# Altium PCB PCB_模电_2025-09-03.pcbdoc
Units mil, origin at the board's own origin, x right, y up, seen from the top; angles counter-clockwise.
Board outline 6910 x 4415 mil, 2 copper layers (Top Layer, Bottom Layer); 50 components, 24 nets, 114 pads, 2 vias.
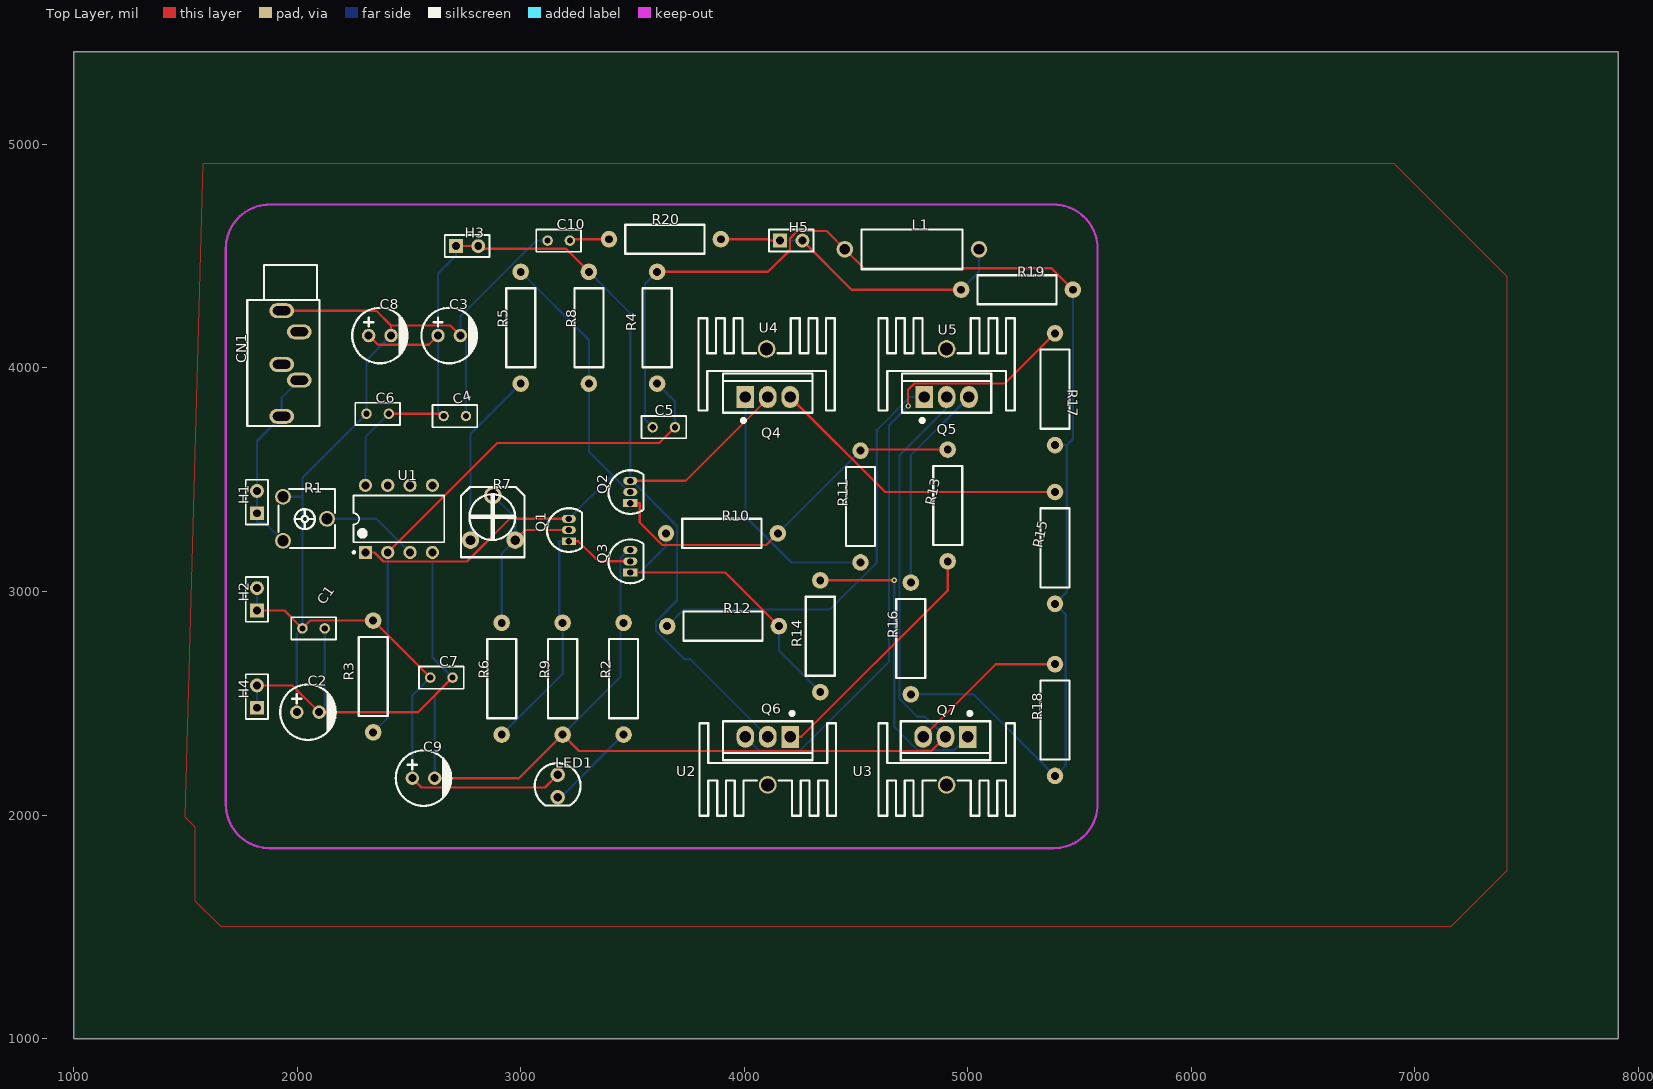
[diagram p0: Top Layer view]
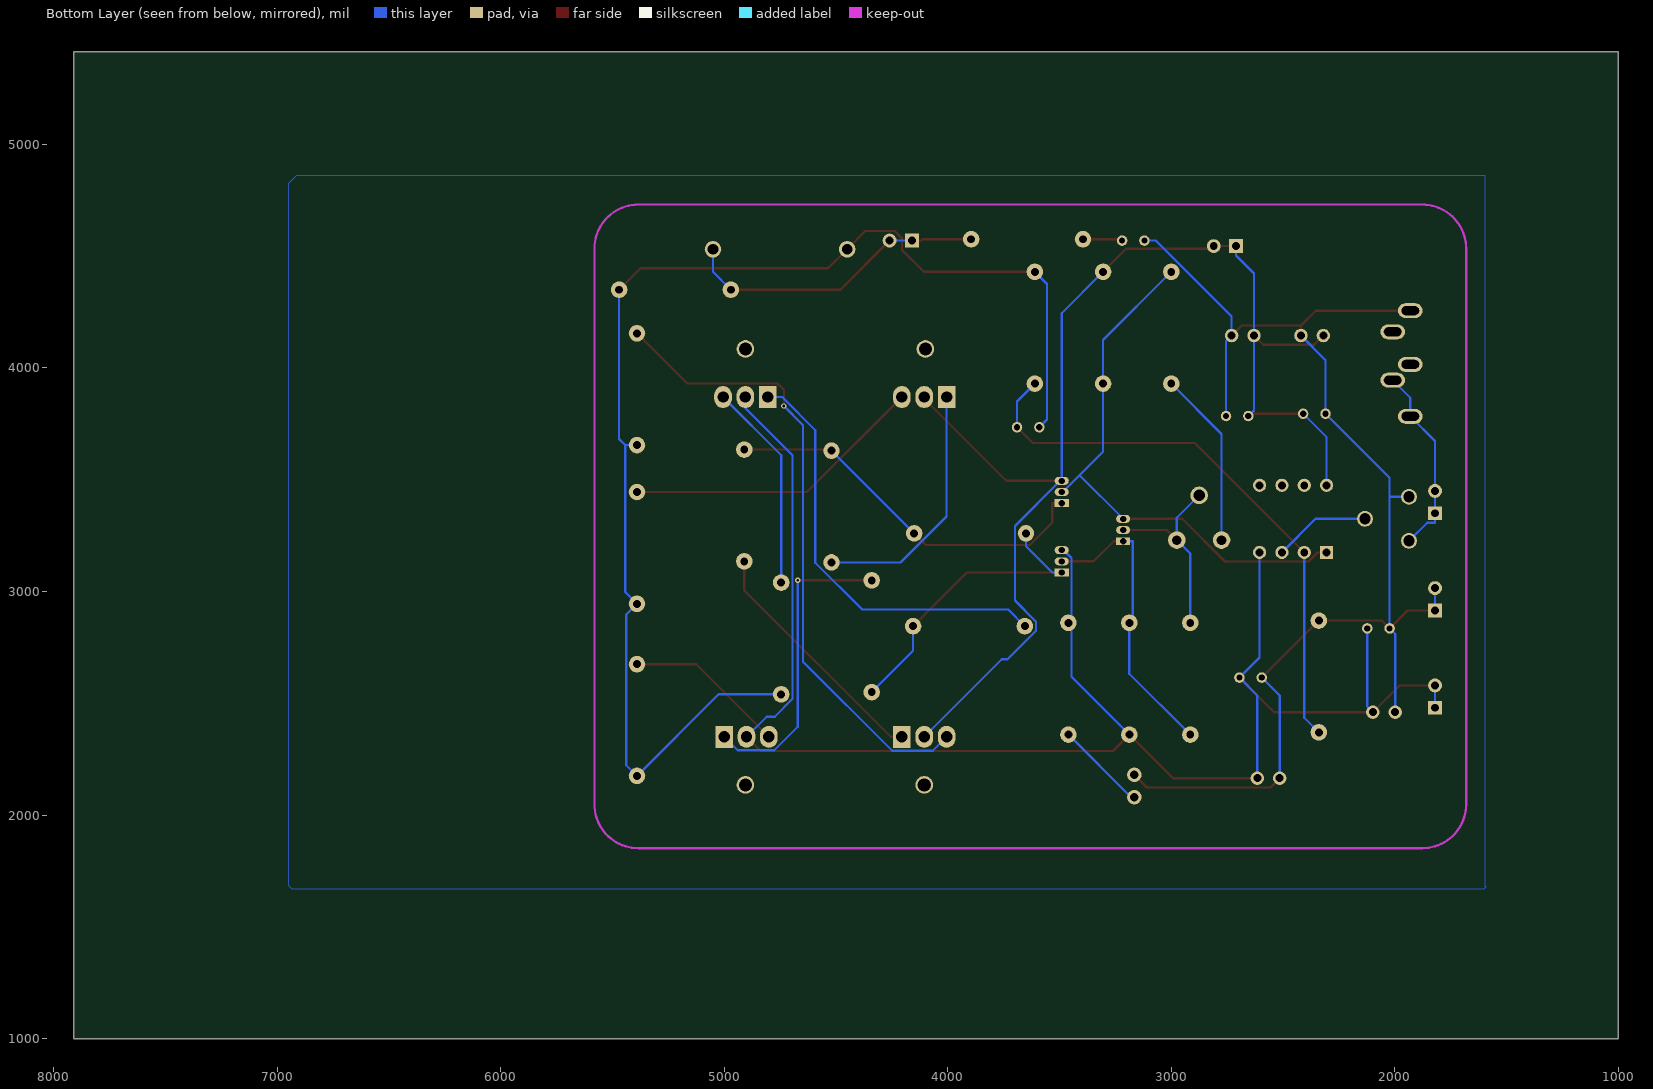
[diagram p1: Bottom Layer view, seen from below]

## Layer stack, top to bottom
Top Layer: signal copper (thickness not stored)
Dielectric: dielectric 12.6, FR-4, Dk 4.8
Bottom Layer: signal copper (thickness not stored)

## Board outline
7910,1000 1000,1000 1000,5415 7910,5415

## Components (designator, comment, footprint, x,y, rotation, side; value= is the part's Value field where it differs from the comment)
C1 "0.1u" RAD-0.1 2073.24,2835 r0 top
C2 "10u" CAP-D6.3×F2.5 2048.14,2460 r0 top
C3 "10u" CAP-D6.3×F2.5 2680,4145 r0 top
C4 "0.1u" RAD-0.1 2705.1,3785 r0 top
C5 "0.1u" RAD-0.1 3640,3735 r180 top
C6 "0.1u" RAD-0.1 2360,3795 r0 top
C7 "0.1u" RAD-0.1 2645,2615 r0 top
C8 "10u" CAP-D6.3×F2.5 2370,4145 r0 top
C9 "10u" CAP-D6.3×F2.5 2565,2165 r0 top
C10 "0.1u" RAD-0.1 3170,4570 r0 top
CN1 "PJ-325C5-G" AUDIO-TH_PJ-325C5-G 1970,4020 r270 top
H1 "HDR-2.54" HDR-F-2.54_1X2 1820,3400 r90 top
H2 "HDR-2.54" HDR-F-2.54_1X2 1820,2965 r90 top
H3 "HDR-2.54" HDR-F-2.54_1X2 2760,4545 r0 top
H4 "HDR-2.54" HDR-F-2.54_1X2 1820,2530 r90 top
H5 "HDR-2.54" HDR-F-2.54_1X2 4210,4569.9 r0 top
L1 "1U" L_AXIAL-0.6 4750,4530.9 r0 top
LED1 "LED-TH-5mm_G" LED-TH_BD5.0_GREEN 3165,2130 r0 top
Q1 "S8050" TO-92-3_L4.9-W3.7-P1.27-L 3215,3275 r90 top
Q2 "S8050" TO-92-3_L4.9-W3.7-P1.27-L 3489.99,3445 r90 top
Q3 "S8550" TO-92-3_L4.9-W3.7-P1.27-L 3490,3135 r90 top
Q4 "TIP41C" TO-220-3_L10.0-W4.5-P2.54-T 4105,3870 r90 top
Q5 "TIP42C" TO-220-3_L10.0-W4.5-P2.54-T 4905,3870 r90 top
Q6 "TIP41C" TO-220-3_L10.0-W4.5-P2.54-T 4105,2350 r270 top
Q7 "TIP42C" TO-220-3_L10.0-W4.5-P2.54-T 4900,2350 r270 top
R1 "20K" RES-ADJ-TH_EVND8AA 2035,3325 r0 top
R2 "500k" R_AXIAL-0.5 3460,2610 r90 top
R3 "1k" R_AXIAL-0.5 2340,2620 r270 top
R4 "9.1k" R_AXIAL-0.5 3610,4180 r90 top
R5 "8.2k" R_AXIAL-0.5 3000,4180 r90 top
R6 "3.3k" R_AXIAL-0.5 2915,2610 r90 top
R7 "2K" RES-ADJ-TH_VZ067TL1B202 2875,3330 r0 top
R8 "6.8k" R_AXIAL-0.5 3305,4180 r90 top
R9 "6.8k" R_AXIAL-0.5 3187.5,2610 r90 top
R10 "220R" R_AXIAL-0.5 3900,3260 r0 top
R11 "47R" R_AXIAL-0.5 4520,3380 r90 top
R12 "47R" R_AXIAL-0.5 3905,2845 r0 top
R13 "47R" R_AXIAL-0.5 4910,3385 r90 top
R14 "47R" R_AXIAL-0.5 4340,2800 r270 top
R15 "0.22R" R_AXIAL-0.5 5390,3195 r90 top
R16 "0.22R" R_AXIAL-0.5 4745,2790 r90 top
R17 "0.22R" R_AXIAL-0.5 5390,3905 r270 top
R18 "0.22R" R_AXIAL-0.5 5390,2425 r90 top
R19 "10R" R_AXIAL-0.5 5220,4350 r0 top
R20 "10R" R_AXIAL-0.5 3645,4575.9 r180 top
U1 "NE5532P" DIP-8_L9.4-W6.4-P2.54-LS9.1-BL 2455,3325 r0 top
U2 "15*10.5*21" SINK-TH_L15.0-W10.5-H21.0 4105,2135 r180 top
U3 "15*10.5*21" SINK-TH_L15.0-W10.5-H21.0 4905,2135 r180 top
U4 "15*10.5*21" SINK-TH_L15.0-W10.5-H21.0 4100,4085 r0 top
U5 "15*10.5*21" SINK-TH_L15.0-W10.5-H21.0 4905,4085 r0 top

## Footprints (in the part's own frame and the unit in brackets; to place one, negate y for a bottom-side part, rotate by r counter-clockwise, add the part's x,y. Pads: shape width x height; smd on the part's side, far side on the other; paste and mask are expansions set on the pad)
AUDIO-TH_PJ-325C5-G [mm]
  oval 1.7x2.8 hole 1 slot 2 at 90 deg paste+0 mask+0.051: 1(-6,-1) 2(-3.6,1) 3(1.9,1) 4(6,-1) 5(0.1,-1)
  silkscreen extent -11.2,-4.9 7.1,3.3
CAP-D6.3×F2.5 [mil]
  round 60 hole 36 paste+0 mask+4: 1(-50,0) 2(50,0)
  silkscreen extent -124,-124 125,124
DIP-8_L9.4-W6.4-P2.54-LS9.1-BL [mm]
  rect 1.5x1.5 hole 0.9 paste+0 mask+0.102: 1(-3.81,-3.81)
  round 1.5 hole 0.9 paste+0 mask+0.102: 2(-1.27,-3.81) 3(1.27,-3.81) 4(3.81,-3.81) 5(3.81,3.81) 6(1.27,3.81) 7(-1.27,3.81) 8(-3.81,3.81)
  silkscreen extent -5.23,-3.93 5.15,2.65
HDR-F-2.54_1X2 [mil]
  rect 62x62 hole 35 paste+0 mask+2: 1(-50,0)
  round 62 hole 35 paste+0 mask+2: 2(50,0)
  silkscreen extent -100,-49 100,50
L_AXIAL-0.6 [mil]
  round 74 hole 47.2 paste+0 mask+2: 1(-300,0) 2(300,0)
  silkscreen extent -226,-89 226,89
LED-TH_BD5.0_GREEN [mil]
  round 65 hole 38 paste+0 mask+2: 1(0,50) 2(0,-50)
  silkscreen extent -102,-88 102,102
R_AXIAL-0.5 [mil]
  round 74 hole 35.4 paste+0 mask+2: 1(-250,0) 2(250,0)
  silkscreen extent -177,-65 177,65
RAD-0.1 [mil]
  round 47 hole 28 paste+0 mask+2: 1(-50,0) 2(50,0)
  silkscreen extent -100,-50 100,50
RES-ADJ-TH_EVND8AA [mm]
  round 1.8 hole 1.3 paste+0 mask+0.051: 1(-2.5,2.5) 2(2.5,0) 3(-2.5,-2.5)
  silkscreen extent -3,-3.3 3.4,3.4
RES-ADJ-TH_VZ067TL1B202 [mm]
  round 2 hole 1.1 paste+0 mask+0.051: 1(-2.54,-2.54) 3(2.54,-2.54)
  round 2 hole 1.3 paste+0 mask+0.051: 2(0,2.54)
  silkscreen extent -3.6,-4.5 3.6,3.5
SINK-TH_L15.0-W10.5-H21.0 [mm]
  round 2 hole 1.5 paste+0 mask+0.051: 1(0,0)
  silkscreen extent -7.75,-7 7.75,3.5
TO-92-3_L4.9-W3.7-P1.27-L [mm]
  rect 0.9x1.6 hole 0.7 paste+0 mask+0.051: 1(-1.27,0)
  oval 0.9x1.6 hole 0.7 paste+0 mask+0.051: 2(0,0) 3(1.27,0)
  silkscreen extent -2.48,-1.5 2.48,2.48
TO-220-3_L10.0-W4.5-P2.54-T [mm]
  rect 2.5x2 hole 1.3 paste+0 mask+0.051: 1(0,2.54)
  oval 2.5x2 hole 1.3 paste+0 mask+0.051: 2(0,0) 3(0,-2.54)
  silkscreen extent -2.86,-5.08 2.67,5.08

## Via types
v1: diameter 24, hole 12, Top Layer to Bottom Layer, tented both sides, 2 vias

## Nets (pads, with @x,y where several pads share a name; then routed paths per layer and width w, separated by ;. In a path a pad name is that pad's centre, name@x,y a point inside that pad or via, vN(x,y) a via of type N, cw(c..) or ccw(c..) an arc to the next point about the centre after c; other vN are vias at no path point)
CN1_4: CN1.3 CN1.4 H1.1 H1.2 R1.3 | length 866
  Bottom Layer w10: R1.3 1855.16,3307.99 1820,3307.99 H1.1 H1.2 1820,3673.15 CN1.4 1930.63,3866.46 CN1.3
GND: C1.1 C2.1 C3.2 C4.2 C6.1 C7.1 C8.2 C9.1 C10.1 CN1.1 H2.1 H2.2 LED1.1 R1.1 R3.1 | length 6025.4
  Top Layer w10: H2.1 1943.24,2915 C1.1 2058.24,2870 R3.1 C7.1 ; CN1.1 2353.87,4256.22 2420,4190.09 ; C8.2 2420,4190.09 ; C9.1 2556.46,2123.54 3108.54,2123.54 LED1.1 ; C3.2 2684.91,4190.09 2420,4190.09
  Bottom Layer w10: H2.1 H2.2 ; R1.1 2023.24,3423.42 ; C2.1 1998.14,2809.9 C1.1 2023.24,3423.42 ; C8.2 2310,4035 C6.1 2023.24,3508.24 2023.24,3423.42 ; C9.1 2515,2535 C7.1 ; C4.2 2755.1,4119.9 C3.2 2730,4230.5 3069.5,4570 C10.1
LED1_2: LED1.2 R2.1 | length 411
  Bottom Layer w10: LED1.2 3180,2080 R2.1
Q3_1: Q3.1 R10.1 R12.2 R14.2 | length 1402.2
  Top Layer w10: Q3.1 3915,3085 R12.2
  Bottom Layer w10: Q3.1 3532.51,3085 3650,3202.49 R10.1 ; R12.2 4155,2735 R14.2
Q4_1: Q4.1 R11.1 | length 1134.5
  Bottom Layer w10: Q4.1 4005,3335.73 4210.73,3130 R11.1
Q4_3: Q4.3 R15.2 | length 1361
  Top Layer w10: Q4.3 4630,3445 R15.2
Q5_1: Q5.1 R12.1 | length 1921.9
  Bottom Layer w10: R12.1 3729.32,2919.32 4382.49,2919.32 4592.05,3128.88 4592.05,3721.84 4740.21,3870 4754.59,3870 Q5.1
Q5_3: Q5.3 R16.2 | length 937.7
  Bottom Layer w10: R16.2 4745,3610 Q5.3
Q6_1: Q6.1 R13.1 | length 1106.6
  Top Layer w10: Q6.1 4255.41,2350 4910,3004.59 R13.1
Q6_3: Q6.3 R17.1 | length 2845.8
  Top Layer w10: v1(4732.84,3830.01) 4732.84,3902.1 4761.01,3930.27 5165.27,3930.27 R17.1
  Bottom Layer w10: Q6.3 4066.98,2288.02 4248.47,2288.02 4647.87,2687.42 4647.87,3745.04 v1(4732.84,3830.01)
Q7_1: Q7.1 R14.1 | length 1383.6
  Top Layer w10: R14.1 v1(4670.94,3050)
  Bottom Layer w10: v1(4670.94,3050) 4670.94,2395.04 4776.29,2289.69 4939.69,2289.69 Q7.1
Q7_3: Q7.3 R18.2 | length 724.6
  Top Layer w10: Q7.3 5125,2675 R18.2
R1_2: R1.2 U1.3 | length 433.7
  Bottom Layer w10: R1.2 2355.01,3324.99 U1.3
R4_2: C5.2 L1.1 R4.2 R15.1 R16.1 R17.2 R18.1 R19.2 | length 5902.8
  Top Layer w10: R4.2 4106.51,4430 4204.33,4527.82 4204.33,4579.6 4236.92,4612.19 4368.71,4612.19 L1.1 4535.11,4445.79 5374.22,4445.78 R19.2
  Bottom Layer w10: C5.2 3555.72,3769.28 3555.72,4375.72 R4.2 ; R16.1 5025,2540 R18.1 5438.08,2223.08 5438.08,2896.92 R15.1 5442.53,2997.53 5442.53,3655 ; R17.2 5442.53,3655 ; R19.2 5470,3682.47 5442.53,3655
R6_1: Q1.1 Q3.2 R6.1 R9.2 | length 1338.9
  Top Layer w10: Q1.1 3257.51,3225 3347.51,3135 Q3.2
  Bottom Layer w10: R6.1 3187.5,2632.5 R9.2 3172.49,2875.01 3172.49,3225 Q1.1
R6_2: Q1.2 R6.2 R7.2 R7.3 | length 894.9
  Top Layer w10: R7.3 3020,3275 Q1.2
  Bottom Layer w10: R7.2 2975,3330 R7.3 2915,3170 R6.2
R7_1: R5.1 R7.1 | length 793.2
  Bottom Layer w10: R7.1 2775,3705 R5.1
R10_2: Q2.1 R10.2 R11.2 R13.2 | length 1724.3
  Top Layer w10: Q2.1 3532.5,3395 3532.5,3309.2 3633.37,3208.33 4098.33,3208.33 R10.2 ; R11.2 4525,3635 R13.2
  Bottom Layer w10: R10.2 R11.2
R19_1: H5.1 H5.2 L1.2 R19.1 R20.1 | length 1382.6
  Top Layer w10: R20.1 4111.99,4575.9 4117.99,4569.9 H5.1 ; H5.2 4479.9,4350 R19.1
  Bottom Layer w10: H5.1 H5.2 ; R19.1 5050,4430 L1.2
R20_2: C10.2 R20.2 | length 177.4
  Top Layer w10: C10.2 3225.9,4575.9 R20.2
U1_1: Q1.3 Q2.2 R5.2 R8.1 U1.1 | length 2472.8
  Top Layer w10: U1.1 2345.54,3175 2386.45,3134.09 2759.6,3134.09 2950.51,3325 Q1.3
  Bottom Layer w10: R5.2 3305,4125 R8.1 3305,3625.49 3410.25,3520.25 ; Q1.3 3410.25,3520.25 ; Q2.2 3485.49,3445 3410.25,3520.25
U1_2: C5.1 R3.2 R4.1 U1.2 | length 2577
  Top Layer w10: U1.2 2894.54,3664.54 3619.54,3664.54 C5.1
  Bottom Layer w10: R3.2 2405,2435 U1.2 ; R4.1 3690,3850 C5.1
VCC: C3.1 C4.1 C6.2 C8.1 H3.1 H3.2 Q2.3 Q4.2 Q6.2 R8.2 U1.8 | length 5685.9
  Top Layer w10: C8.1 2361.08,4103.92 2588.92,4103.92 C3.1 ; C6.2 2645.1,3795 C4.1 ; H3.1 H3.2 2822.18,4532.82 3202.18,4532.82 R8.2 ; Q2.3 3737.55,3495 4105,3862.45 Q4.2
  Bottom Layer w10: U1.8 2305,3690 C6.2 ; C4.1 2630,3810.1 C3.1 2630,4422.99 2710,4502.99 H3.1 ; R8.2 3490,4245 Q2.3 3497.33,3495 3699.36,3292.97 3699.36,2959.51 3605.15,2865.3 3605.15,2825.03 3733.03,2697.15 3757.85,2697.15 Q6.2
VEE: C1.2 C2.2 C7.2 C9.2 H4.1 H4.2 Q3.3 Q5.2 Q7.2 R2.2 R9.1 U1.4 | length 7658.9
  Top Layer w10: H4.2 1978.14,2580 C2.2 2540,2460 C7.2 ; C9.2 2992.5,2165 R9.1 3260.55,2286.95 4836.95,2286.95 Q7.2
  Bottom Layer w10: H4.1 H4.2 ; C2.2 2123.24,2485.1 C1.2 ; U1.4 2605,2705 C7.2 2615,2535 C9.2 ; R9.1 3446.58,2619.08 R2.2@3446.58,2860 ; R2.2 R2.2@3446.58,2860 ; Q3.3 3482.18,3185 3446.58,3149.4 R2.2@3446.58,2860 ; Q7.2 4810.06,2439.94 4774.15,2439.94 4694.01,2520.08 4694.01,3609.33 4905,3820.32 Q5.2
pads on no net: CN1.2 CN1.5 U1.5 U1.6 U1.7 U2.1 U3.1 U4.1 U5.1

## Polygon pours and split planes (outlines as drawn)
GND on Bottom Layer (solid): 1595,4860 6915,4860 6950,4825 6950,1685 6935,1670 1600,1670 1590,1680 1595,1680
GND on Top Layer (solid): 1580,4915 6905,4915 7410,4410 7410,1750 7160,1500 1660,1500 1545,1615 1545,1945 1500,1990

## Keep-outs
Keep-Out Layer:
  lines w10: 1680.59,2048.62 ccw(c1877.44,2048.62) 1877.44,1851.77 ; 1680.59,4533.93 cw(c1877.44,4533.93) 1877.44,4730.78 ; 5383.74,1851.77 ccw(c5383.74,2048.62) 5580.59,2048.62 ; 5383.74,4730.78 cw(c5383.74,4533.93) 5580.59,4533.93